# Altium PCB mchf_pro_mix.PcbDoc (part 2 of 2)
Units mil, origin at the board's own origin, x right, y up, seen from the top; angles counter-clockwise.
Board outline 3100.2 x 3132.7 mil, 2 copper layers (Top Layer, Bottom Layer); 178 components, 123 nets, 498 pads, 246 vias.
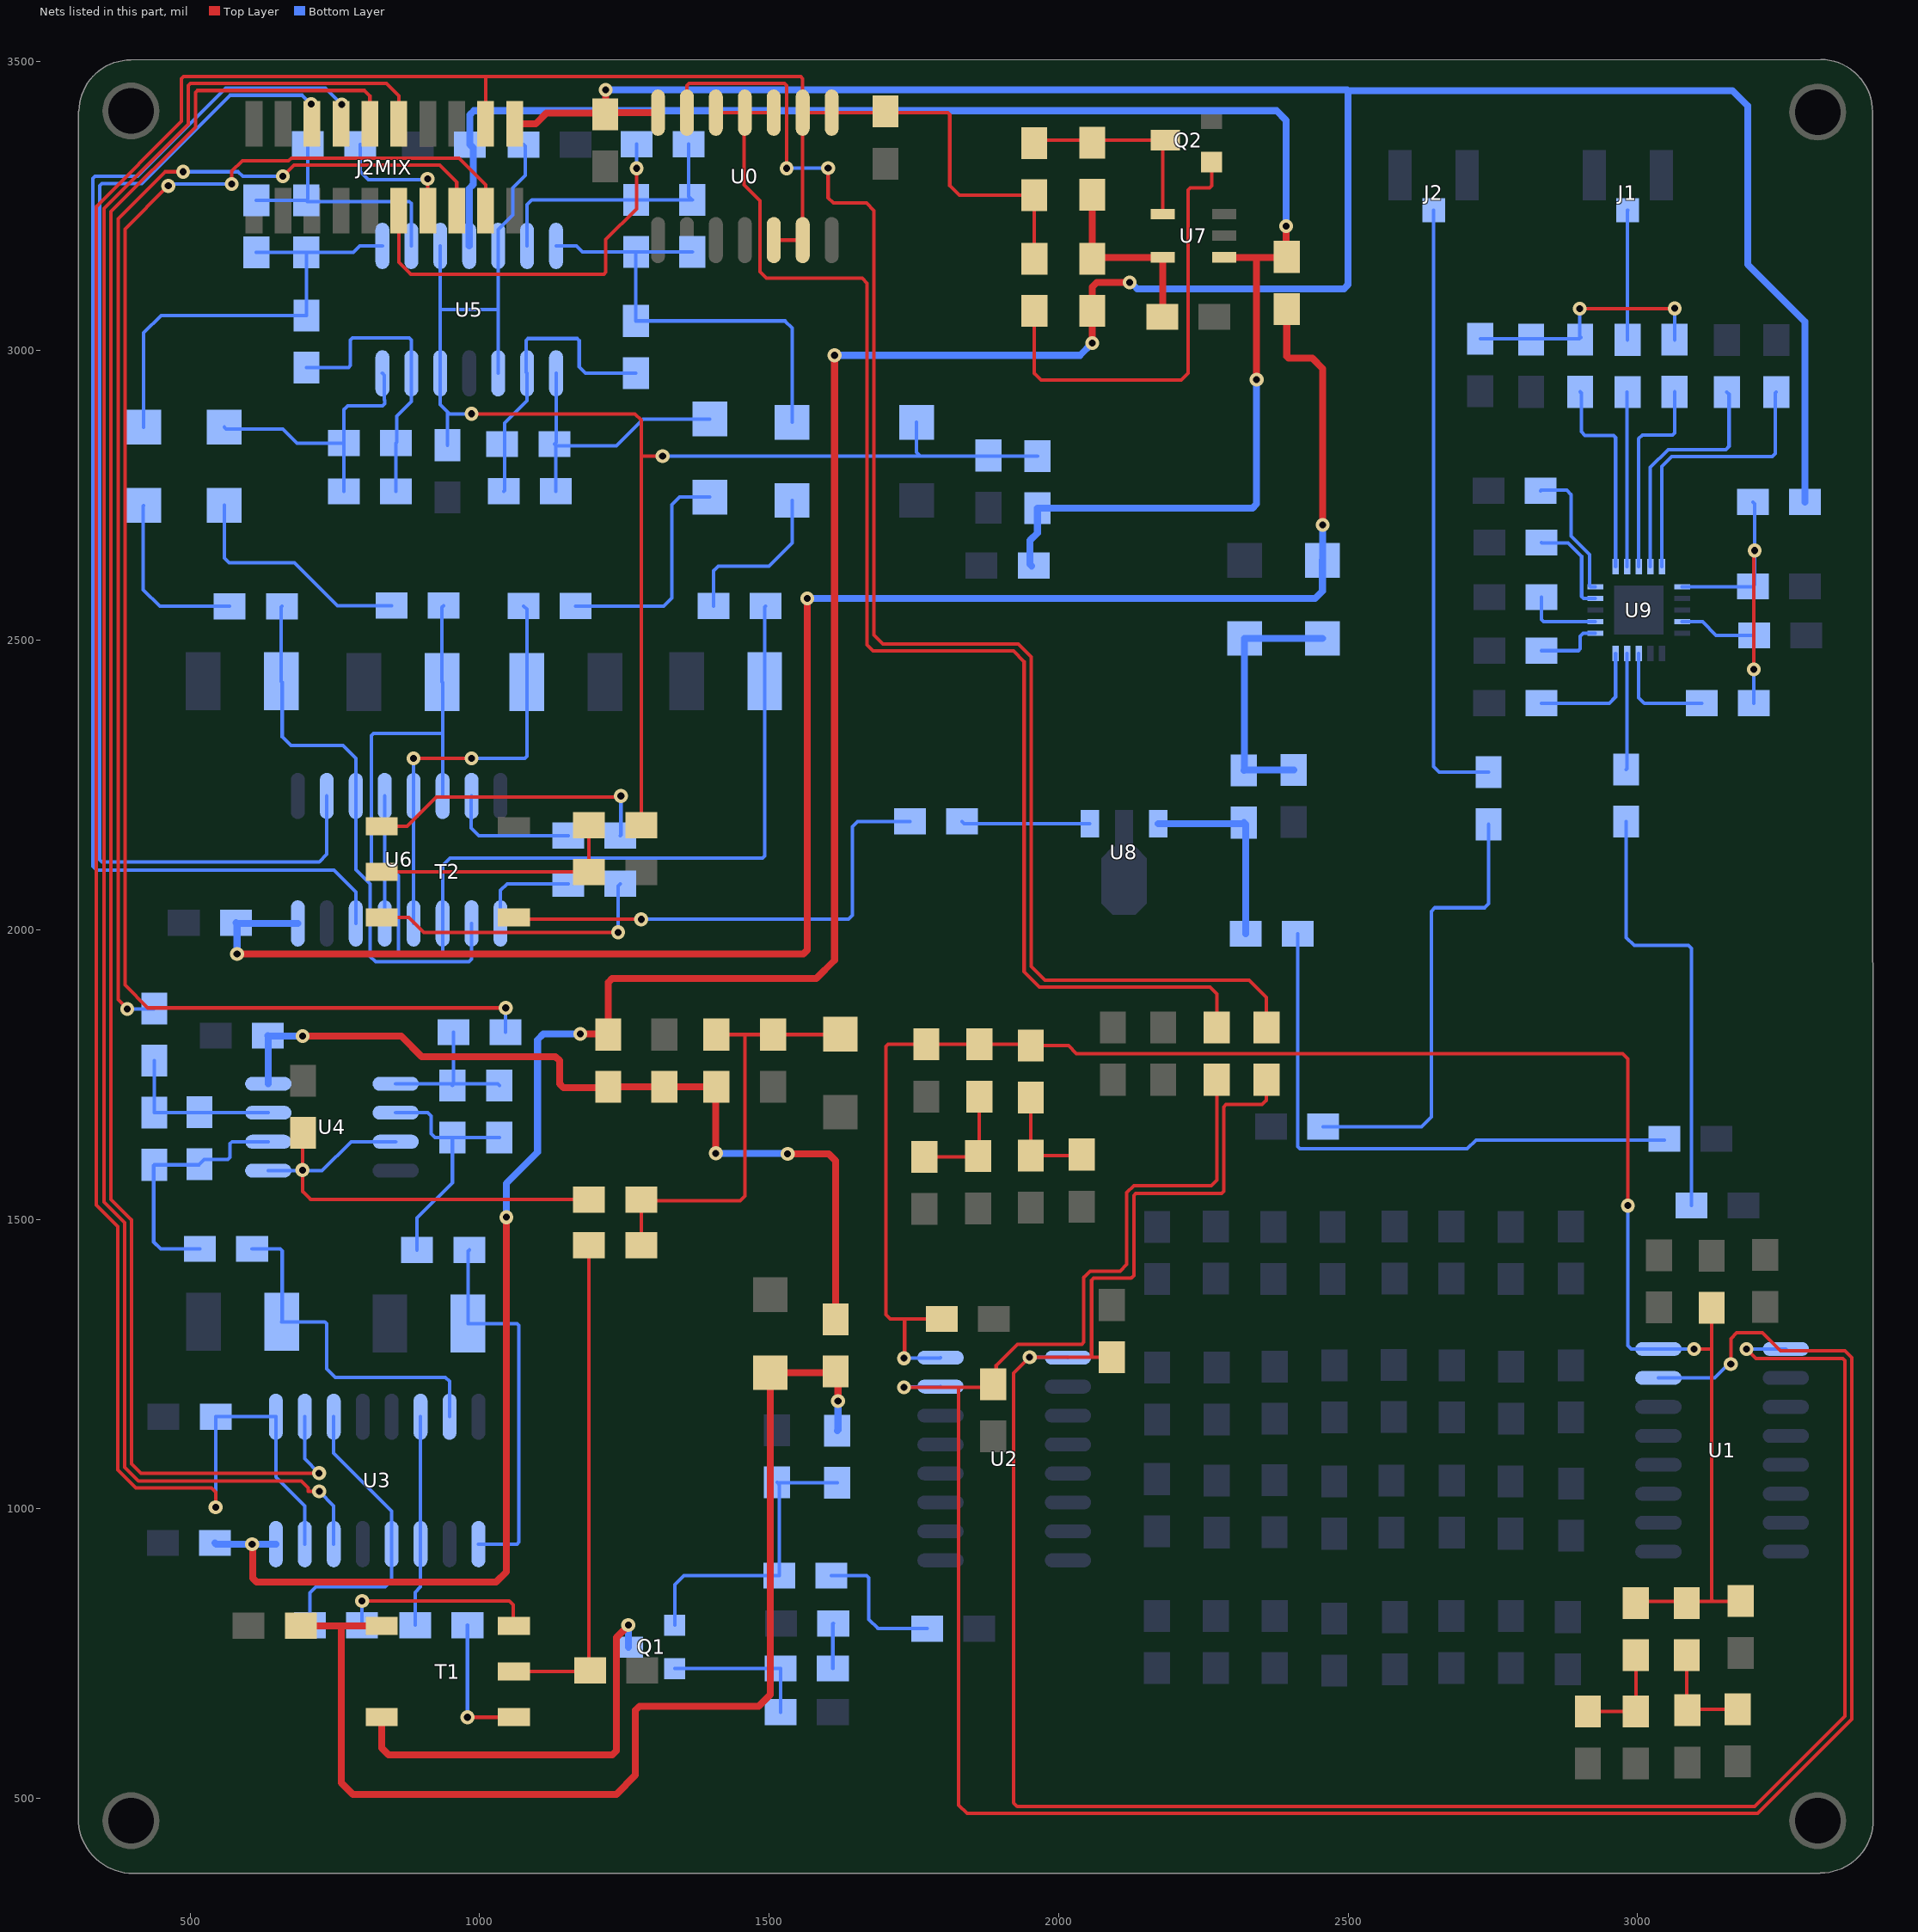
[diagram p2: the nets of this part, all layers, seen from the top]

## Via types
v1: diameter 24, hole 12, Top Layer to Bottom Layer, 246 vias

## Nets (pads, with @x,y where several pads share a name; then routed paths per layer and width w, separated by ;. In a path a pad name is that pad's centre, name@x,y a point inside that pad or via, vN(x,y) a via of type N, cw(c..) or ccw(c..) an arc to the next point about the centre after c; other vN are vias at no path point) (continued)
NetC30_1: C30.1 C31.1 R20.2 R21.1 T1.4 | length 2067
  Top Layer w12: C31.1@691,798 691.26,797.74 761.04,797.74 ; T1.4@830.83,797.74 761.04,797.74 ; v1(1619,1186) 1619,1229 1613,1235 C30.1@1502,1235 1502,679 1482,659 1276.03,659 1269,651.97 1269,540 1236,507 781,507 761.04,526.96 761.04,797.74
  Bottom Layer w12: R21.1@1617.56,1134.85 1619,1136.3 v1(1619,1186)
NetC30a_1: C30a.1 M4.1 | length 245.5
  Bottom Layer w6: C30a.1@1607.77,884.73 1668.49,884.73 1672,881.22 1672,809 1688,793 M4.1@1773,793
NetC30a_2: C30a.2 Q1.1 R21.2 R22.1 | length 523
  Bottom Layer w6: Q1.1@1337,799 1337,869 1352.73,884.73 C30a.2@1517.77,884.73 1517.77,1041.47 R22.1@1514.39,1044.85 ; R22.1@1513.63,1045.61 R22.1@1514.39,1044.85 ; R21.2@1617.55,1044.85 R22.1@1514.39,1044.85
NetC32_2: C32.2 R24.1 | length 78.1
  Bottom Layer w6: R24.1@1610.01,724.31 1610.01,801.31 C32.2@1610.76,802.06
NetC36_1: C36.1 R27.1 U3.9 | length 662.7
  Bottom Layer w6: R27.1@982,1447 980,1445 C36.1@980,1320 1064.49,1320 1068,1316.49 1068,942.51 1064.49,939 U3.9@998,939
NetC37_1: C37.1 R28.1 U3.7 | length 615.4
  Bottom Layer w6: R28.1@607,1449 655.49,1449 659,1445.49 659,1324 C37.1@658,1323 732.49,1323 736,1319.49 736,1242 751,1227 941,1227 948,1220 U3.7@948,1159
NetC38_1: C38.1 R27.2 R29.1 U4.2 | length 433.7
  Bottom Layer w6: U4.2@855,1684 910,1684 916,1678 916,1648 923,1641 C38.1@953,1641 ; R27.2@892,1447 892,1502 953,1563 C38.1@953,1641 ; R29.1@1034,1641 C38.1@953,1641
NetC38_2: C38.2 R29.2 R30.1 U4.1 | length 273.1
  Bottom Layer w6: U4.1@855,1734 C38.2@955,1734 ; C38.2@953,1731 955,1733 C38.2@955,1734 ; R30.1@955,1823 C38.2@955,1734 ; R29.2@1034,1731 1031,1734 C38.2@955,1734
NetC39_1: C39.1 R28.2 R32.1 U4.6 | length 445.7
  Bottom Layer w6: R28.2@517,1449 449,1449 437,1461 437,1593 R32.1@438,1594 515,1594 C39.1@516,1595 524,1603 565,1603 569,1607 569,1630.49 572.51,1634 U4.6@635,1634
NetC39_2: C39.2 R31.1 R32.2 U4.7 | length 287
  Bottom Layer w6: R31.1@438,1774.01 R32.2@438,1684 U4.7@635,1684
NetC41_1: C41.1 R33.2 U4.3 U4.5 | length 842.9
  Top Layer w6: C41.1@695,1649 694,1648 694,1548 708,1534 R33.2@1189,1534
  Bottom Layer w6: U4.5@635,1584 728,1584 778,1634 U4.3@855,1634
  other v1: 694,1585
NetC42_1: C42.1 R33.1 R34.1 R35.1 R36.2 | length 755.6
  Top Layer w6: R34.1@1279,1455 R33.1@1279,1534 1281,1532 1450,1532 1458,1540 1458,1819 ; R35.1@1409,1819 1458,1819 ; C42.1@1623,1820 1622,1819 R36.2@1507,1819 1458,1819
NetC50_1: C50.1 R40.2 R42.1 U5.2 | length 441.2
  Bottom Layer w6: C50.1@614.3,3259.56 R42.1@700.66,3259.56 ; R40.2@703.4,3356.44 703.4,3265 703.4,3262.3 R42.1@700.66,3259.56 ; U5.2@882,3181 882,3254.24 878.49,3257.76 702.46,3257.76 R42.1@700.66,3259.56
NetC50_2: C50.2 C54.1 R42.2 R44.1 U5.1 | length 788
  Bottom Layer w6: C54.1@419.71,2867.73 419.71,3030.71 450,3061 R44.1@701,3061 701,3169.22 R42.2@700.66,3169.56 ; C50.2@614.3,3169.56 R42.2@700.66,3169.56 ; U5.1@832,3181 793,3181 781.56,3169.56 R42.2@700.66,3169.56
NetC51_1: C51.1 C57.1 R43.1 R45.1 U5.7 | length 796.4
  Bottom Layer w6: U5.7@1132,3181 1167,3181 1177.69,3170.31 R43.1@1270.37,3170.31 ; C51.1@1367.24,3170.31 R43.1@1270.37,3170.31 ; C57.1@1539.76,2876.46 1539.76,3039.24 1527.62,3051.38 R45.1@1269.92,3051.38 1269.92,3169.87 R43.1@1270.37,3170.31
NetC51_2: C51.2 R41.2 R43.2 U5.6 | length 458.5
  Bottom Layer w6: U5.6@1082,3181 1082,3252 1090.31,3260.31 R43.2@1270.37,3260.31 C51.2@1367.24,3260.31 1361,3266.55 R41.2@1361,3356.59
NetC52_1: C52.1 C55.1 R46.2 U5.14 | length 488
  Bottom Layer w6: C55.1@559,2868 562,2865 660,2865 684.51,2840.49 C52.1@765.45,2840.49 ; R46.2@765.45,2757.11 C52.1@765.45,2840.49 ; U5.14@832,2961 835.44,2957.56 835.44,2915.07 836,2914.51 836,2908.51 832.49,2905 772,2905 765.45,2898.45 C52.1@765.45,2840.49
NetC52_2: C52.2 R44.2 R46.1 U5.13 | length 501.7
  Bottom Layer w6: R44.2@701,2971 773.49,2971 777,2974.51 777,3018.47 780.51,3021.98 878.49,3021.98 882,3018.47 882,2912 857,2887 857,2842.04 C52.2@855.45,2840.49 R46.1@855.45,2757.11
NetC53_1: C53.1 C56.1 R47.2 U5.8 | length 491.1
  Bottom Layer w6: R47.2@1131.7,2757.19 C53.1@1131.7,2836.01 ; U5.8@1132,2961 1132,2841.56 C53.1@1129.08,2838.64 C53.1@1131.7,2836.01 ; C56.1@1397.58,2882.09 1282.09,2882.09 1236.01,2836.01 C53.1@1131.7,2836.01
NetC53_2: C53.2 R45.2 R47.1 U5.9 | length 520.4
  Bottom Layer w6: R47.1@1041.7,2757.19 1043,2758.49 1043,2875 1082,2914 U5.9@1082,2961 1080,2963 1080,3017.44 1083.51,3020.96 1168.49,3020.96 1172,3017.44 1172,2972 1180.02,2963.98 1182.62,2961.38 R45.2@1269.92,2961.38
NetC54_2: C54.2 R48.1 | length 307.1
  Bottom Layer w6: C54.2@419.71,2732.73 419,2732.02 419,2587 447.44,2558.56 R48.1@568.28,2558.56
NetC55_2: C55.2 R49.1 | length 413.9
  Bottom Layer w6: C55.2@559,2733 559,2642 567,2634 680,2634 754.22,2559.78 R49.1@847.86,2559.78
NetC56_2: C56.2 R50.1 | length 403.8
  Bottom Layer w6: R50.1@1166,2559 1318,2559 1332,2573 1332,2734 1345.09,2747.09 C56.2@1397.58,2747.09
NetC57_2: C57.2 R51.1 | length 290.1
  Bottom Layer w6: R51.1@1404.05,2559.14 1404.05,2620.05 1412,2628 1500,2628 1539.76,2667.76 C57.2@1539.76,2741.46
NetC58_1: C58.1 R48.2 U6.3 U6.10 | length 964
  Bottom Layer w6: R48.2@658.28,2558.56 657.38,2557.66 C58.1@657.38,2429 659,2427.38 659,2333 674,2318 764,2318 786,2296 U6.3@786,2231 786,2104 811,2079 811,1954 820.43,1944.57 981.57,1944.57 986,1949 U6.10@986,2011
NetC59_1: C59.1 R49.2 U6.6 U6.13 | length 788.8
  Bottom Layer w6: U6.13@836,2011 836,2085.69 813,2108.69 813,2335.49 816.51,2339 936,2339 ; U6.6@936,2231 936,2339 ; R49.2@937.86,2559.78 935,2556.92 C59.1@935,2428 936,2427 936,2339
NetC60_1: C60.1 R50.2 U6.5 U6.12 | length 744.1
  Top Layer w6: v1(885.79,2295.84) 885.87,2295.92 985.92,2295.92 v1(986,2296)
  Bottom Layer w6: v1(885.79,2295.84) 885.89,2295.74 885.89,2231.11 U6.5@886,2231 U6.12@886,2011 ; v1(986,2296) 1078.11,2296 1081.62,2299.51 1081.62,2553.38 R50.2@1076,2559
NetC61_1: C61.1 R51.2 U6.4 U6.11 | length 1503.6
  Bottom Layer w6: U6.4@836,2231 836,2117 859.6,2093.4 859.6,1961.51 863.11,1958 932.49,1958 936,1961.51 U6.11@936,2011 936,2111 949,2124 1488.88,2124 1492.39,2127.51 C61.1@1492.39,2429 1492.39,2557.48 R51.2@1494.05,2559.14
NetC63_2: C63.2 RFC2.2 T2.2 | length 439
  Top Layer w6: T2.2@830.83,2100 1188.78,2100 C63.2@1189,2099.78 RFC2.2@1189,2180.53
NetC64_2: C64.2 M10.2 R55.1 U7.5 | length 336.4
  Top Layer w12: R55.1@2058,3269 M10.2@2058,3158.62 2060.6,3161.22 U7.5@2179.85,3161.22 2179.85,3059.42 C64.2@2178.94,3058.51
NetC70_1: C70.1 U8.1 | length 222.6
  Bottom Layer w6: C70.1@1833,2187 1837.07,2182.93 U8.1@2053.94,2182.93
NetC71_1: C71.1 C72.1 R58.2 RFC4.2 | length 448.2
  Bottom Layer w12: RFC4.2@2320,2275 RFC4.2@2321,2276 ; C71.1@2406,2276 RFC4.2@2321,2276 ; R58.2@2455.69,2503.13 C72.1@2321,2503.13 RFC4.2@2321,2276
NetC73_1: C73.1 M2.2 | length 1008.8
  Bottom Layer w6: C73.1@2413,1993 2413,1625.3 2416.51,1621.79 2705.79,1621.79 2720.86,1636.86 M2.2@3046.41,1636.86
NetC73_2: C73.2 RFC4.1 U8.3 | length 342
  Bottom Layer w12: U8.3@2172.06,2182.93 2317.93,2182.93 RFC4.1@2320,2185 2323,2182 C73.2@2323,1993
NetC80_1: C80.1 U9.2 | length 301.7
  Bottom Layer w6: U9.2@2982,2627 C80.1@2982,2928.74
NetC81_1: C81.1 R60.1 R63.1 R64.1 | length 443.8
  Top Layer w6: v1(2900.1,3072.62) 3063.62,3072.62 v1(3064,3073)
  Bottom Layer w6: R60.1@2728.27,3020.34 2899.43,3020.34 2902,3022.9 2900.1,3024.8 v1(2900.1,3072.62) ; R64.1@3064,3018.72 R64.1@3063.82,3018.91 3064,3019.09 v1(3064,3073)
NetC82_1: C82.1 M1.2 | length 764.5
  Bottom Layer w6: C82.1@2980.3,2186.75 2980.3,1986.7 2994,1973 3088,1973 3093,1968 M1.2@3093,1524
NetC82_2: C82.2 U9.14 | length 201
  Bottom Layer w6: C82.2@2980.3,2276.75 2982,2278.45 U9.14@2982,2477
NetC83_1: C83.1 C84.1 M20.2 M21.1 U9.6 U9.9 | length 785.6
  Top Layer w6: v1(3200.9,2449.85) 3200.9,2653.9 v1(3202,2655)
  Bottom Layer w6: U9.9@3077,2532 3112,2532 3135.58,2508.42 C83.1@3200.9,2508.42 ; U9.6@3077,2592 3198,2592 C84.1@3199,2593 3202,2596 v1(3202,2655) 3202,2735.68 M21.1@3199,2738.68 ; M20.2@3200.95,2391.27 C83.1@3200.9,2508.42 ; v1(3200.9,2449.85) C83.1@3200.9,2508.42
NetC85_2: C85.2 M3.1 | length 790.2
  Bottom Layer w6: M3.1@2457,1660 2627,1660 2644,1677 2644,2031.97 2650.03,2038 2735.92,2038 2742.63,2044.72 C85.2@2742.63,2182.01
NetJ2MIX_A2: J2MIX.A2 R30.2 | length 2772.2
  Top Layer w6: v1(462.22,3284.59) 387.41,3209.78 387.41,1904.59 427,1865 v1(1045,1865) ; v1(572,3288) 572,3310 590,3328 670.03,3328 674.75,3332.72 964.31,3332.72 1010.43,3286.59 J2MIX.A2@1010.43,3241.54
  Bottom Layer w6: v1(462.22,3284.59) 465.63,3288 v1(572,3288) ; R30.2@1045,1823 v1(1045,1865)
NetJ2MIX_A3: J2MIX.A3 R31.2 | length 2109.8
  Top Layer w6: v1(391.37,1863.26) 375.41,1879.22 375.41,3227.48 456.93,3309 v1(488,3309) ; v1(660,3301) 679.72,3320.72 930.76,3320.72 960.43,3291.05 J2MIX.A3@960.43,3241.54
  Bottom Layer w6: v1(391.37,1863.26) 437.25,1863.26 R31.2@438,1864.01 ; v1(488,3309) 583,3309 591,3301 v1(660,3301)
NetJ2MIX_A4: J2MIX.A4 R40.1 | length 226
  Top Layer w6: v1(910,3297) 910,3241.97 J2MIX.A4@910.43,3241.54
  Bottom Layer w6: R40.1@793.4,3356.44 793.4,3309.6 808,3295 908,3295 v1(910,3297)
NetJ2MIX_A5: J2MIX.A5 R41.1 | length 699.5
  Top Layer w6: J2MIX.A5@860.43,3241.54 860.43,3152.57 881,3132 1214.49,3132 1218,3135.51 1218,3192 1271,3245 v1(1271,3315)
  Bottom Layer w6: v1(1271,3315) R41.1@1271,3356.59
NetJ2MIX_A15: J2MIX.A15 U3.14 | length 3341.2
  Top Layer w6: v1(722.9,1030.03) 704,1030.03 704,1036 692,1048 411,1048 387,1072 387,1494.01 351.41,1529.6 351.41,3245.5 497.08,3391.16 497.08,3457.82 500.59,3461.33 839.01,3461.33 860.43,3439.91 J2MIX.A15@860.43,3391.54
  Bottom Layer w6: v1(722.9,1030.03) 748,1004.94 U3.14@748,939
NetJ2MIX_A16: J2MIX.A16 U3.2 | length 3236.5
  Top Layer w6: v1(722.76,1061.58) 415,1061.58 399,1077.58 399,1498.98 363.41,1534.57 363.41,3240.53 509.08,3386.19 509.08,3445.82 512.59,3449.33 801.01,3449.33 810.43,3439.91 J2MIX.A16@810.43,3391.54
  Bottom Layer w6: U3.2@698,1159 698,1086.34 v1(722.76,1061.58)
NetJ2MIX_A17: J2MIX.A17 U6.14 | length 2271.9
  Top Layer w6: J2MIX.A17@760.43,3391.54 760.43,3433.51 762,3431.95 v1(762,3425)
  Bottom Layer w6: v1(762,3425) 733.83,3453.17 561.63,3453.17 409.47,3301 335.44,3301 331.93,3297.49 331.93,2109.76 338.69,2103 748.26,2103 786,2065.26 U6.14@786,2011
NetJ2MIX_A18: J2MIX.A18 U6.2 | length 2150.7
  Top Layer w6: v1(709,3426) 709,3432.36 710.43,3433.8 J2MIX.A18@710.43,3391.54
  Bottom Layer w6: v1(709,3426) 693.83,3441.17 569.07,3441.17 416.39,3288.49 347.44,3288.49 343.93,3284.97 343.93,2120.66 347.44,2117.15 722.84,2117.15 736,2130.31 U6.2@736,2231
NetM11_1: M11.1 Q2.3 R55.2 U7.4 | length 357.8
  Top Layer w6: M11.1@1958,3358.25 1963.34,3363.59 Q2.3@2184.18,3363.59 2179.85,3359.26 U7.4@2179.85,3236.03
NetM20_1: M20.1 U9.13 | length 188.9
  Bottom Layer w6: U9.13@3002,2477 3002,2401 3011.73,2391.27 M20.1@3110.95,2391.27
NetQ1_2: Q1.2 R23.2 R24.2 | length 258
  Bottom Layer w6: Q1.2@1337,724 1519.7,724 1520.01,723.69 R23.2@1520.01,648.83
NetQ1_3: Q1.3 T1.6 | length 730.6
  Top Layer w12: T1.6@830.83,640.26 830.83,587.17 843,575 1229.19,575 1236.22,582.03 1236.22,777.72 1256.76,798.26 v1(1256.76,799.32)
  Bottom Layer w12: v1(1256.76,799.32) 1256.76,761.24 Q1.3@1257,761
NetQ2_1: Q2.1 R54.1 | length 784.2
  Top Layer w6: R54.1@1958.14,3068.62 1958.14,2960.86 1970,2949 2211.97,2949 2223.84,2960.87 2223.84,3277.57 2227.36,3281.09 2260.67,3281.09 2264.18,3284.6 Q2.1@2264.18,3325.59
NetR1_2: R1.2 R3.2 R4.1 | length 182.4
  Top Layer w6: R4.1@3085,747 3085,653 3086,654 R1.2@3173,654
NetR2_2: R2.2 R5.2 R6.1 | length 188.5
  Top Layer w6: R5.2@1952,1710 R6.1@1952,1610 2037.92,1610 R2.2@2039.78,1611.86
NetR7_2: R7.2 R8.1 R11.1 | length 180
  Top Layer w6: R11.1@2914,650 R7.2@2997,650 R8.1@2997,747
NetR9_2: R9.2 R10.1 R12.1 | length 197.2
  Top Layer w6: R12.1@1768,1608 1860,1608 R10.1@1861,1609 1863,1611 R9.2@1863,1712
NetR25_1: R25.1 T1.1 | length 239.3
  Top Layer w6: v1(979,640) 1058.91,640 T1.1@1059.17,640.26
  Bottom Layer w6: v1(979,640) R25.1@979,799
NetR25_2: R25.2 U3.6 U3.11 | length 363.7
  Bottom Layer w6: R25.2@889,799 889,856 898,865 U3.11@898,939 U3.6@898,1159
NetR26_1: R26.1 T1.3 | length 342.8
  Top Layer w6: v1(797,841) 1051,841 1058,834 1058,798.91 T1.3@1059.17,797.74
  Bottom Layer w6: R26.1@796.59,799 797,799.41 v1(797,841)
NetR26_2: R26.2 U3.3 U3.12 | length 530.3
  Bottom Layer w6: R26.2@706.59,799 706.59,854.59 717,865 837,865 848,876 U3.12@848,939 848,996 748,1096 U3.3@748,1159
NetR52_1: R52.1 U6.9 | length 178.6
  Bottom Layer w6: U6.9@1036,2011 1036,2068 1047.38,2079.38 R52.1@1152.86,2079.38
NetR52_2: R52.2 T2.3 | length 504.2
  Top Layer w6: T2.3@830.83,2021.26 877.74,2021.26 903.42,1995.58 v1(1238.98,1995.58)
  Bottom Layer w6: v1(1238.98,1995.58) 1238.98,2075.51 R52.2@1242.86,2079.38
NetR53_1: R53.1 U6.7 | length 228.8
  Bottom Layer w6: U6.7@986,2231 985,2230 985,2176 998.36,2162.64 R53.1@1152.86,2162.64
NetR53_2: R53.2 T2.1 | length 503.6
  Top Layer w6: T2.1@830.83,2178.74 874.74,2178.74 925,2229 1242,2229 v1(1244,2231)
  Bottom Layer w6: R53.2@1242.86,2162.64 1244,2163.78 v1(1244,2231)
NetR61_1: R61.1 U9.4 | length 417.8
  Bottom Layer w6: U9.4@3022,2627 3022,2798.34 3052.66,2829 3152.19,2829 3158,2834.81 3158,2924.73 R61.1@3154.15,2928.58
NetR62_1: R62.1 U9.5 | length 485
  Bottom Layer w6: U9.5@3042,2627 3042,2800 3059,2817 3232.38,2817 3238,2822.62 3238,2927 R62.1@3239.58,2928.58
NetR63_2: R63.2 U9.1 | length 356.1
  Bottom Layer w6: R63.2@2900.86,2928.91 2902.86,2926.91 2902.86,2860.01 2909.25,2853.62 2958.49,2853.62 2962,2850.1 U9.1@2962,2627
NetR64_2: R64.2 U9.3 | length 357.8
  Bottom Layer w6: U9.3@3002,2627 3002,2848 3008.53,2854.53 3060.3,2854.53 3063.82,2858.05 R64.2@3063.82,2928.91
NetR65_1: R65.1 U9.20 | length 237.8
  Bottom Layer w6: R65.1@2832.43,2758.1 2833.33,2759 2877.49,2759 2885.03,2751.46 2885.03,2679.98 2917.2,2647.81 2917.2,2593.5 2918.7,2592 U9.20@2927,2592
NetR66_1: R66.1 U9.19 | length 173.5
  Bottom Layer w6: R66.1@2834.04,2668.6 2834.64,2668 2880.03,2668 2903.32,2644.71 2903.32,2575.51 2906.83,2572 U9.19@2927,2572
NetR67_1: R67.1 U9.17 | length 133.3
  Bottom Layer w6: R67.1@2834.04,2574.39 2834.04,2535.51 2837.56,2532 U9.17@2927,2532
NetR68_1: R68.1 U9.16 | length 118
  Bottom Layer w6: R68.1@2834.04,2481.95 2897.49,2481.95 2901,2485.46 2901,2507 2906,2512 U9.16@2927,2512
NetR69_2: R69.2 U9.15 | length 207.7
  Bottom Layer w6: R69.2@2833.71,2391.27 2951.27,2391.27 2962,2402 U9.15@2962,2477
PTT: C25.1 M7.2 U1.1 U2.1 | length 4119.3
  Top Layer w6: C25.1@2092,1262 2057,1262 ; M7.2@2359.06,1741 2359.06,1705.4 2351.66,1698 2289.08,1698 2285.08,1694 2285.08,1548.1 2281.57,1544.58 2133.34,1544.58 2129.82,1541.07 2129.82,1402.95 2125.28,1398.41 2060.51,1398.41 2057,1394.89 2057,1262 ; v1(3188,1276) 3204.64,1259.36 3354.59,1259.36 3358.11,1255.84 3358.11,641.68 3202.16,485.73 1928.51,485.73 1922,492.25 1922,1234 v1(1950,1262) 2057,1262
  Bottom Layer w6: v1(1950,1262) 1950.5,1261.5 2015.5,1261.5 U2.1@2016,1261 ; v1(3188,1276) U1.1@3256,1276
PTT_3V: C0a.1 C34.1 J2MIX.A12 M11.2 R54.2 U0.5 U0.6 U0.8 U0.9 U3.1 U3.15 | length 5318.3
  Top Layer w6: v1(544.01,1002.68) 544,1029 537,1036 406.03,1036 375,1067.03 375,1487.14 337.8,1524.34 337.8,3248.86 485.08,3396.13 485.08,3469.82 488.59,3473.33 1010.43,3473.33 ; J2MIX.A12@1010.43,3391.54 1010.43,3473.33 ; U0.5@1508,3191 U0.6@1558,3191 U0.9@1558,3411 ; R54.2@1958.14,3158.62 1958.14,3268.11 M11.2@1958,3268.25 1828.75,3268.25 1812,3285 1812,3407.49 1808.49,3411 1701,3411 U0.8@1608,3411 U0.9@1558,3411 ; 1010.43,3473.33 1554.49,3473.33 1558,3469.82 U0.9@1558,3411
  Bottom Layer w6: v1(544.01,1002.68) C34.1@544,1159 U3.1@648,1159 648,1055 698,1005 U3.15@698,939
PTT_5V: M7.1 U0.13 | length 2611.9
  Top Layer w6: U0.13@1358,3411 1358,3457.82 1361.51,3461.33 1526.49,3461.33 1530,3457.82 v1(1530,3315) ; v1(1601.86,3315.51) 1601.86,3264.14 1611,3255 1668,3255 1681,3242 1681,2509 1696.46,2493.54 1930.37,2493.54 1952.41,2471.5 1952.41,1936.68 1976.31,1912.78 2329.22,1912.78 2359.06,1882.94 M7.1@2359.06,1831
  Bottom Layer w6: v1(1530,3315) 1530.25,3315.25 1601.61,3315.25 v1(1601.86,3315.51)
PTT_N: C26.1 M8.2 U1.15 U2.15 | length 4451.6
  Top Layer w6: v1(1733,1210) 1827.26,1210 ; M8.2@2273.08,1741 2273.08,1567.33 2263.76,1558 2129.78,1558 2117.82,1546.04 2117.82,1421.98 2106.26,1410.41 2054.48,1410.41 2043.56,1399.49 2043.56,1287.89 2040.04,1284.38 1928.58,1284.38 1892.18,1247.99 1892.18,1220.18 1882,1210 1827.26,1210 ; v1(3161,1250) 3161,1293.71 3171.18,1303.89 3215.75,1303.89 3246.64,1273 3358.11,1273 3370.11,1261 3370.11,636.71 3207.13,473.73 1841.94,473.73 1827.26,488.4 1827.26,1210
  Bottom Layer w6: v1(1733,1210) 1733.5,1210.5 1795.5,1210.5 U2.15@1796,1211 ; U1.15@3036,1226 3133,1226 3157,1250 v1(3161,1250)
PTT_N5V: M8.1 U0.10 U0.11 U0.12 | length 2429.9
  Top Layer w6: U0.12@1408,3411 U0.11@1458,3411 ; U0.10@1508,3411 U0.11@1458,3411 ; M8.1@2273.08,1831 2273.08,1888.92 2261.22,1900.78 1967.1,1900.78 1940.41,1927.47 1940.41,2463.01 1922.15,2481.28 1679.72,2481.28 1669,2492 1669,3116.7 1660.7,3125 1495,3125 1483.92,3136.08 1483.92,3259.08 1456.84,3286.16 1456.84,3409.84 U0.11@1458,3411
QSD_BIAS: C33.1 R34.2 T1.2 | length 862.3
  Top Layer w6: T1.2@1059.17,719 1183,719 1189,725 R34.2@1189,1455
RX_ANT: C80.2 J1.2 | length 224.2
  Bottom Layer w6: C80.2@2982.65,3018.74 2982.65,3242.35 J1.2@2983.07,3242.76
RXD_A5V: C40.2 C43.2 R20.1 R35.2 RFC1.1 U4.8 | length 1520.8
  Top Layer w12: v1(694.11,1816.33) 864.67,1816.33 900,1781 1130.97,1781 1138,1773.97 1138,1734.03 1145.03,1727 1220,1727 RFC1.1@1222,1729 C43.2@1319,1729 R35.2@1409,1729 1408,1728 v1(1408,1614) ; v1(1532,1613) 1603,1613 1615,1601 R20.1@1615,1327
  Bottom Layer w12: C40.2@634,1817 C40.2@634.67,1816.33 ; U4.8@635,1734 635,1816 C40.2@634.67,1816.33 ; v1(694.11,1816.33) C40.2@634.67,1816.33 ; v1(1408,1614) 1408.5,1613.5 1531.5,1613.5 v1(1532,1613)
SC_A5V: C68.2 C69.2 R56.2 RFC3.1 U5.4 U7.1 | length 2910.5
  Top Layer w12: U7.1@2286.15,3161.22 2339.69,3161.22 ; v1(2342,2950) 2342,3158.91 2339.69,3161.22 ; v1(2393,3215) 2393,3161.44 2393.22,3161.22 2339.69,3161.22
  Bottom Layer w12: U5.4@982,3181 982,3280 989,3287 989,3350 C69.2@983,3356 983,3407.46 990.03,3414.49 2376.51,3414.49 2393,3398 v1(2393,3215) ; C68.2@1953.44,2628.25 1950.44,2631.25 1950.44,2672.25 1963.44,2685.25 R56.2@1963.44,2728.25 2334.97,2728.25 2342,2735.28 v1(2342,2950)
TX_ANT: C85.1 J2.2 | length 1060.1
  Bottom Layer w6: J2.2@2647.59,3242.76 2647.59,2281.78 2657.37,2272.01 C85.1@2742.63,2272.01
TX_MIX_OUT: C70.2 T2.4 | length 844.8
  Top Layer w6: T2.4@1059.17,2021.26 1062.43,2018 v1(1279,2018)
  Bottom Layer w6: v1(1279,2018) 1637,2018 1644,2025 1644,2178 1653,2187 C70.2@1743,2187
TX_OA_BIAS: C65.2 C66.2 C67.1 R56.1 R57.2 RFC2.1 U5.3 U5.5 U5.10 U5.12 | length 2650.4
  Top Layer w6: v1(986,2891) 1268,2891 1279,2880 1279,2818 ; RFC2.1@1279,2180.53 1279,2818 ; v1(1316,2818) 1279,2818
  Bottom Layer w6: U5.3@932,3181 932,3071 ; C65.2@944.41,2836.86 944.41,2894.59 ; v1(986,2891) 948,2891 944.41,2894.59 ; U5.10@1032,2961 1032,3071 ; C66.2@1076,3356 1079,3353 1079,3303 1057.22,3281.22 1057.22,3234.22 1032,3209 U5.5@1032,3181 1032,3071 ; v1(1316,2818) 1760.5,2818 1760.75,2818.25 ; C67.1@1754.67,2876.46 1754.67,2824.33 1760.75,2818.25 ; R56.1@1963.44,2818.25 1760.75,2818.25 ; 932,3071 U5.12@932,2961 932,2907 944.41,2894.59 ; 932,3071 1032,3071
VCC_5V: C1.1 C2.1 C27.1 C28.1 R4.2 R5.1 R8.2 R9.1 U1.16 U2.16 | length 3317.9
  Top Layer w6: v1(1733,1260) 1734,1261 1734,1328 ; C2.1@1798,1328 1734,1328 ; v1(2983.29,1523.6) 2983.29,1777 2974.1,1786.19 2030.81,1786.19 2017,1800 R5.1@1952,1800 1949.99,1802.01 R9.1@1863,1802 C28.1@1771.57,1802.01 1705.51,1802.01 1702,1798.49 1702,1335.12 1709.12,1328 1734,1328 ; R8.2@2998,840 3131,840 ; v1(3097.63,1276.1) 3097.73,1276 3128,1276 ; C1.1@3128,1347 3128,1276 ; C27.1@3178,841 3177,840 3131,840 ; 3128,1276 3128,843 3131,840
  Bottom Layer w6: v1(1733,1260) 1733.5,1260.5 1795.5,1260.5 U2.16@1796,1261 ; v1@2983,1523 2983,1282 2989,1276 U1.16@3036,1276 U1.16@3036,1276 3097.59,1276.05 v1(3097.63,1276.1)
VCC_5V_RF: C0.1 C35.1 J2MIX.A11 M10.1 M21.2 RFC1.2 U0.14 U3.16 | length 7567.7
  Top Layer w12: v1(607,939) 608,938 608,880.4 615.03,873.37 1028.37,873.37 1046,891 v1(1046,1503.53) ; J2MIX.A11@1060.43,3391.54 1096.54,3391.54 1115.42,3410.42 1214.58,3410.42 C0.1@1217,3408 C0.1@1220,3411 ; v1(1174,1820) 1221,1820 RFC1.2@1222,1819 1222,1908.89 1229.03,1915.92 1581.46,1915.92 1613,1947.46 v1(1613,2992) ; v1(1217.67,3450.4) 1217.67,3413.33 C0.1@1220,3411 ; U0.14@1308,3411 C0.1@1220,3411 ; v1(2058,3013) M10.1@2058,3068.62 2058,3110 2065.87,3117.87 v1(2122.67,3117.87)
  Bottom Layer w12: C35.1@543,941 545,939 v1(607,939) U3.16@648,939 ; v1(1046,1503.53) 1046,1562 1100,1616 1100,1810 1110,1820 v1(1174,1820) ; v1(1217.67,3450.4) 2498.6,3450.4 2500,3449 ; v1(1613,2992) 2037,2992 v1(2058,3013) ; v1(2122.67,3117.87) 2124.82,3117.87 2135.69,3107 2492.97,3107 2500,3114.03 2500,3449 ; M21.2@3289,2738.68 3289,3050 3190,3149 3190,3423 3164,3449 2500,3449
VCC_5V_TX: C62.2 R58.1 RFC3.2 U6.16 | length 3187.8
  Top Layer w12: v1(581,1958) 1558.97,1958 1566,1965.03 v1(1566,2572) ; RFC3.2@2394,3072 2394,2990.01 2397.01,2987 2438,2987 2456,2969 v1(2456,2699)
  Bottom Layer w12: C62.2@579,2012 C62.2@580,2011 ; v1(581,1958) 581,2010 C62.2@580,2011 ; U6.16@686,2011 C62.2@580,2011 ; v1(1566,2572) 2443,2572 2455.69,2584.69 R58.1@2455.69,2638.13 2456,2638.44 v1(2456,2699)
pads on no net: J2MIX.A1 J2MIX.A6 U3.4 U3.5 U3.10 U3.13 U7.3

## Polygon pours and split planes (outlines as drawn)
GND on Top Layer "GND_L01_P000" (solid, remove dead copper, pour order 0): 304,3504 304,368 3431,368 3431,3504
GND on Bottom Layer "GND_L02_P001" (solid, remove dead copper, pour order 1): 306,362.67 3428.95,373.54 3434.07,3510.22 306,3497.8

## Keep-outs
Keep-Out Layer:
  lines w6: 306.88,3413.48 306.88,457.96 ccw(c401.92,465.6) 409.56,370.56 3315.1,370.56 3315.55,371 ; 308.01,3413.52 cw(c396.98,3413.03) 397.47,3502 ; 396.95,3502 3315.98,3503 cw(c3315.36,3412.62) 3405.74,3412 3406.48,1225.38 3406.73,1225.13 3406.99,468.84 3407.05,468.78 3407.08,462.99 cw(c3315.55,462.53) 3316,371

## Other copper
Bottom Layer:
  region net GND: 3034,2150 3034,2082 3365,2082 3365,2150
  region net GND: 688,706 688,764 362,764 362,706
  region net GND: 317,1179 377,1179 377,1513 317,1513
  region net GND: 1103,1166 1169,1166 1169,1495 1103,1495
  region net GND: 3348,2452 3396,2452 3396,2770 3348,2770
  region net GND: 2554,2472 2619,2472 2619,2804 2554,2804
  region net GND: 2638,586 2638,513 2998,513 2998,586
  region net GND: 2671,1774 2671,1695 3037,1695 3037,1774
  region net GND: 1262,1776 1262,1697 1613,1697 1613,1776
  region net GND: 1275,587 1275,511 1632,511 1632,587

## Silkscreen, mask and mechanical layers (free items; w line width, h text height)
Top Overlay:
  lines w10: 741,421 1130,421 1130,3092 741,3092 741,425
Bottom Overlay:
  circle w31.5: c397.83,461.42 r58.49
  circle w31.5: c3311.02,461.42 r58.49
  circle w31.5: c3311.02,3412.09 r58.49
  circle w31.5: c397.85,3414.05 r58.49
  lines w10: 318.01,3412.59 cw(c397.85,3414.05) 396.38,3493.89 ; 318,3414.05 318,457.55 ccw(c397.28,457.28) 397,378 3311.12,379.87 ccw(c3313.5,462.37) 3396,460 3396,3412 ccw(c3313.5,3411.5) 3313,3494 397.85,3494
  lines w12: 330,575 330,1931 1148,1931 1148,575 330,575 ; 341,1961 341,3462 1620,3462 1620,1961 341,1961 ; 1148,429 1148,1756 3380,1756 3380,429 1148,429 ; 1671,1878 2506,1878 2506,2422 1671,2422 1671,1878 ; 2528.56,2003 2528.56,3117 3390,3117 3390,2003 2528.56,2003
  lines w20: 1648,3166 1648,3458 2501,3458 2501,3166 1648,3166
  text "mcHF Pro QRP Transceiver" at 2427,3392 h32
  text "Mixer board, rev 0.8.6" at 2398,3333 h32
  text "Krassi Atanassov, M0NKA" at 2406,3262 h32
  text "06 July 2025" at 2233,3196 h32
  text "TX Preamp" at 2021,2323 h32
  text "Attenuator" at 3110,2040 h32
  text "TX Mixer" at 1586,1990 h32
  text "RX Mixer" at 845,639 h32
  text "Bandpass Filters" at 2424,462 h32
Bottom Solder:
  region: 3049.41,2135.69 3049.41,2096.69 3344.41,2096.69 3344.41,2135.69
  region: 376.54,755.21 376.54,716.21 671.54,716.21 671.54,755.21
  region: 365.5,1493 326.5,1493 326.5,1198 365.5,1198
  region: 1154,1480 1115,1480 1115,1185 1154,1185
  region: 1584,1717 1584,1756 1289,1756 1289,1717
  region: 1598.5,528 1598.5,567 1303.5,567 1303.5,528
  region: 2967,528.5 2967,567.5 2672,567.5 2672,528.5
  region: 2704.5,1754 2704.5,1715 2999.5,1715 2999.5,1754
  region: 2606,2784 2567,2784 2567,2489 2606,2489
  region: 3396,2757 3357,2757 3357,2462 3396,2462
Mechanical 1:
  lines w10: 346,735.55 346,1917 1125,1917 1134,1908 1134,735.55 346,735.55 ; 1159,547 1159,1735 3362,1735 3362,546 3361,547 1159,547 ; 2587,2115 3377,2115 3375,2117 3375,3098 3371.55,3101.45 2587,3101.45 2587,2115
  text "PCB thickness 1mm" at 2795,3750 h120
Mechanical 15:
  lines w10: 307.86,616.78 307.86,1518.78 316.86,1527.78 2600.86,1527.78 2600.86,1502.78 2600.86,616.78 309.86,616.78 ; 874,1952 3361,1952 3377,1968 3377,3115 874,3115 ; 2628.33,2030.98 2628.33,2916.98 ; 2688.33,3167.98 2688.33,3444.98

## Dimensions
306.88,3413.48 to 3405.74,3412 on Mechanical 2
397.85,3494 to 409.56,370.56 on Mechanical 2
2587,2115 to 3375,2117 on Mechanical 2
3371.55,3101.45 to 3377,2115 on Mechanical 2
346,735.55 to 1134,735.55 on Mechanical 2
346,1917 to 346,735.55 on Mechanical 2
3361,547 to 3362,1735 on Mechanical 2
1159,547 to 3362,546 on Mechanical 2
397.85,3414.05 to 535.43,3441.54 on Mechanical 15
397.85,3414.05 to 535.43,3191.54 on Mechanical 15
3377,1968 to 2628.33,2030.98 on Mechanical 15
3361,1952 to 3377,3115 on Mechanical 15
2600.86,1527.78 to 2600.86,616.78 on Mechanical 15
307.86,616.78 to 2600.86,616.78 on Mechanical 15
3311.02,3412.09 to 397.85,3414.05 on Mechanical 15
397.85,3414.05 to 397.83,461.42 on Mechanical 15